# Altium PCB Inverter Driver Board.PcbDoc
Units mm, origin at the board's own origin, x right, y up, seen from the top; angles counter-clockwise.
Board outline 180.09 x 150.03 mm, 2 copper layers (Top Layer, Bottom Layer); 42 components, 39 nets, 146 pads, 41 vias.
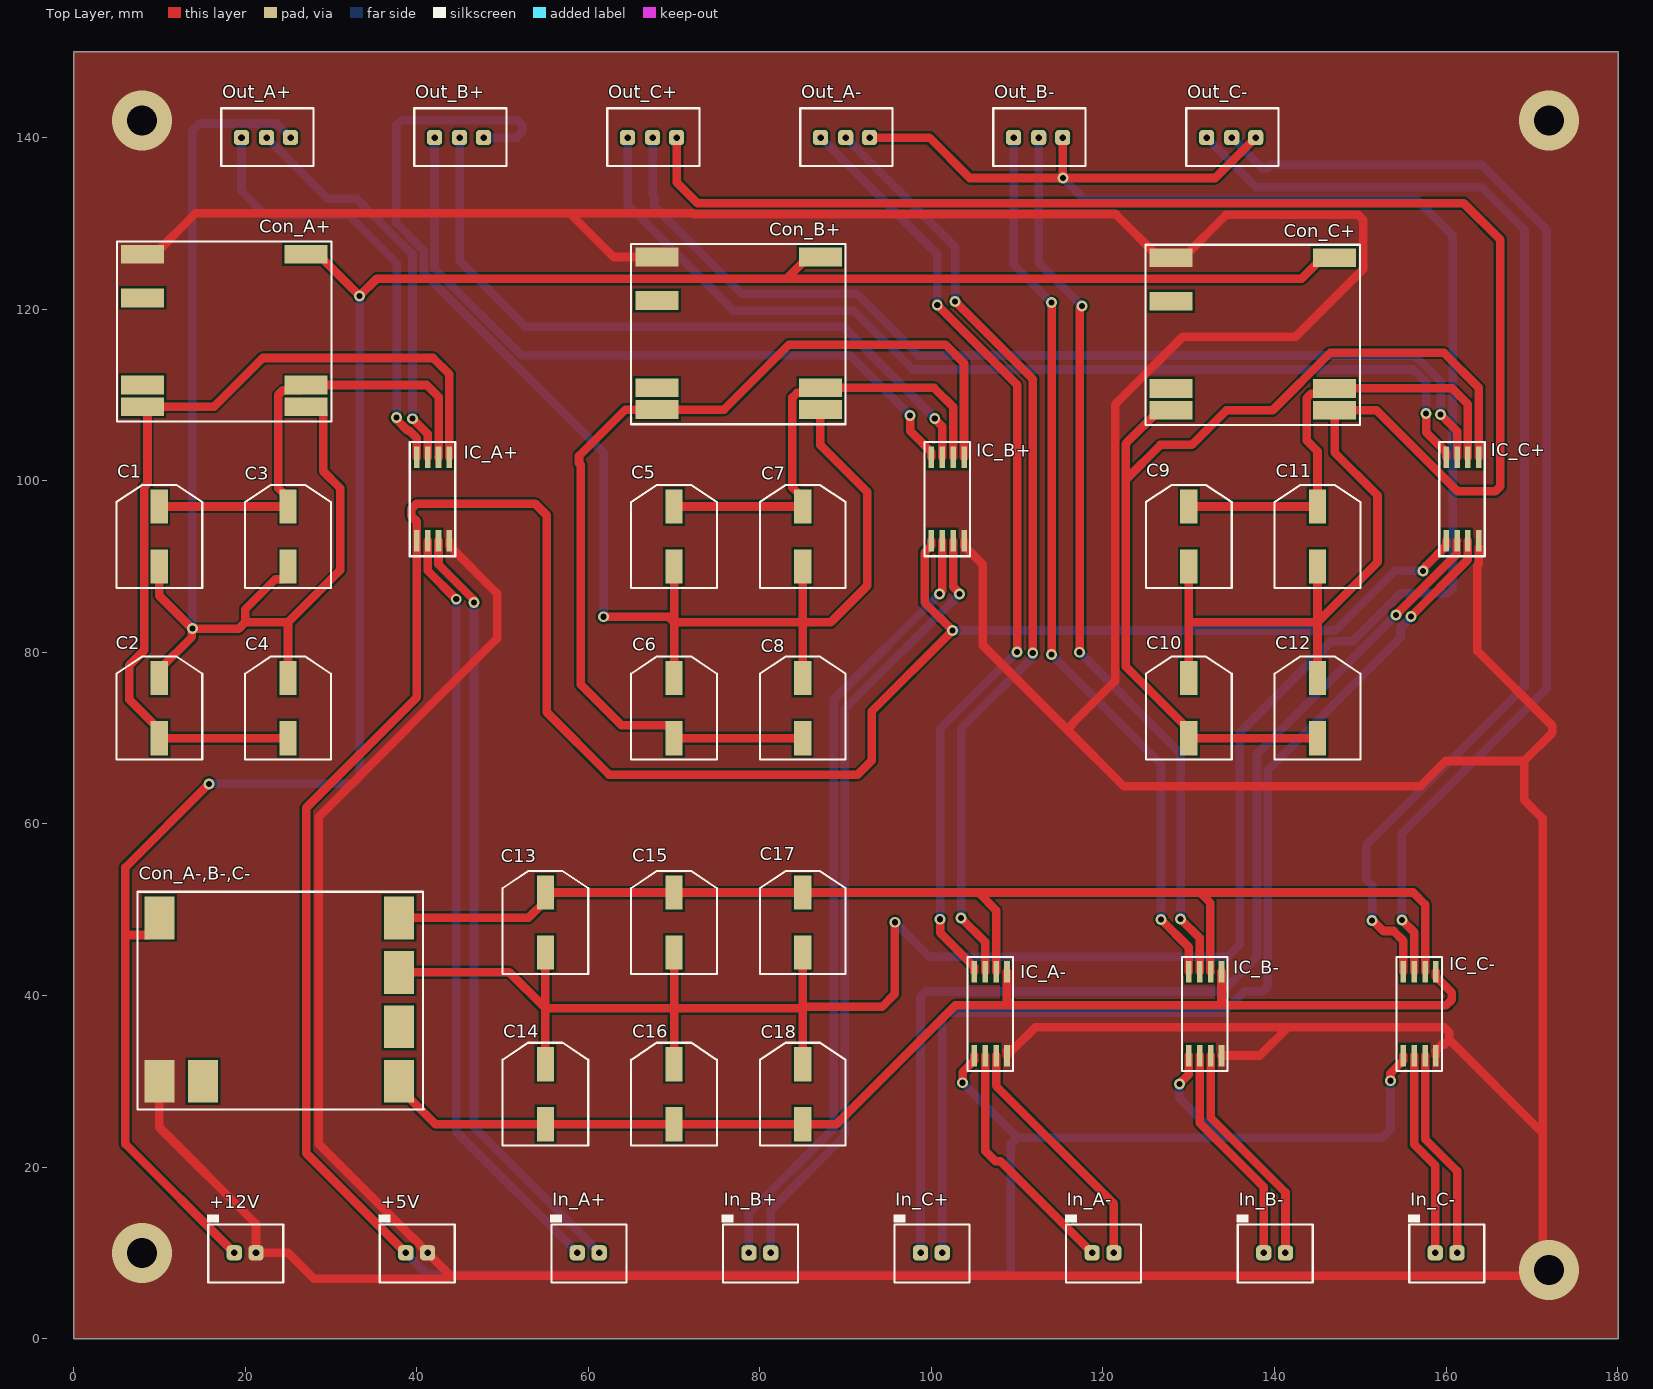
[diagram p0: Top Layer view]
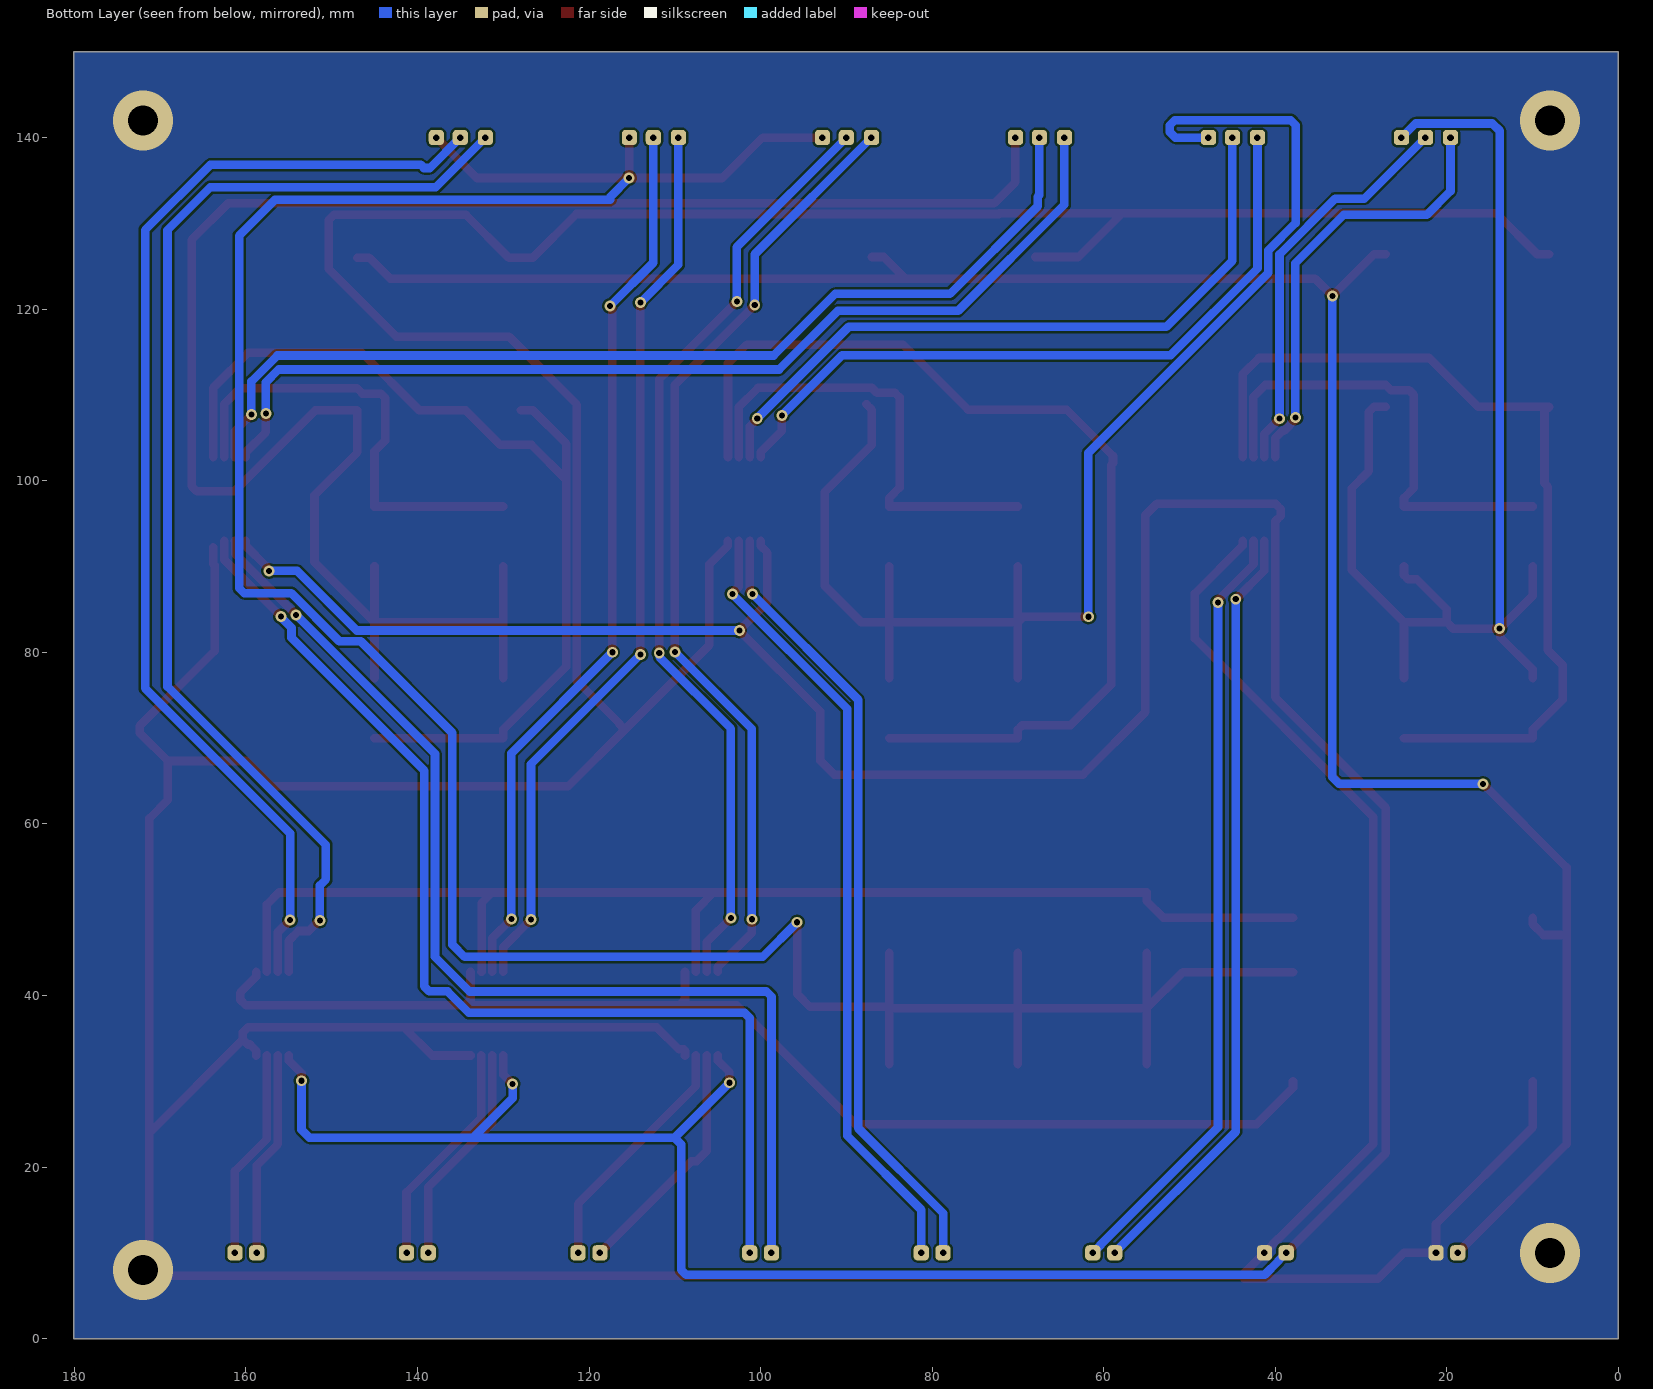
[diagram p1: Bottom Layer view, seen from below]

## Layer stack, top to bottom
Top Solder: solder mask 0.0102, Solder Resist, Dk 3.5
Top Layer: signal copper 0.0356
Dielectric 1: dielectric 0.32, FR-4, Dk 4.8
Bottom Layer: signal copper 0.0356
Bottom Solder: solder mask 0.0102, Solder Resist, Dk 3.5

## Board outline
0,0 180.087,0 180.087,150.032 0,150.032

## Design rules (kind name [scope] priority, off if disabled: settings)
Clearance [All] p1: gap=0.254 ignorepadtopadclearanceinfootprint=FALSE except(0: Arc-Hole Track-Hole SMDPad-Hole THPad-Hole Via-Hole Fill-Hole Poly-Hole Region-Hole Text-Hole)
PolygonConnect [All] p1: connectstyle=Direct reliefconductorwidth=0.254 reliefentries=4 polygonreliefangle="90 Angle" airgapwidth=0.254
RoutingVias [All] p1: holewidth=0.711 width=1.27 viastyle="Through Hole" minholewidth=0.711 minwidth=1.27 maxholewidth=0.711 maxwidth=1.27
SolderMaskExpansion [All] p1: expansion=0.102 istentingtop=FALSE
Width [All] p1: maxlimit=2 minlimit=1 preferedwidth=1 minimp=50.000000 maximp=50.000000 favimp=50.000000
30 further rules are at their usual default settings.

## Components (designator, comment, footprint, x,y, rotation, side; value= is the part's Value field where it differs from the comment)
+5V "JT2" PCBComponent_1#1 40,10 r0 top (schematic designator "+5V Supply")
+12V "JT2" PCBComponent_1#1 20,10 r0 top
C1 "Cap" Cap 10,90 r0 top
C2 "Cap" Cap 10,70 r0 top
C3 "Cap" Cap 25,90 r0 top
C4 "Cap" Cap 25,70 r0 top
C5 "Cap" Cap 70,90 r0 top
C6 "Cap" Cap 70,70 r0 top
C7 "Cap" Cap 85,90 r0 top
C8 "Cap" Cap 85,70 r0 top
C9 "Cap" Cap 130,90 r0 top
C10 "Cap" Cap 130,70 r0 top
C11 "Cap" Cap 145,90 r0 top
C12 "Cap" Cap 145,70 r0 top
C13 "Cap" Cap 55,45 r0 top
C14 "Cap" Cap 55,25 r0 top
C15 "Cap" Cap 70,45 r0 top
C16 "Cap" Cap 70,25 r0 top
C17 "Cap" Cap 85,45 r0 top
C18 "Cap" Cap 85,25 r0 top
Con_A+ "Component_1" PCBComponent_1#2 8.058,126.398 r270 top
Con_A-,B-,C- "MGJ6T12" MGJ6T12 10,30 r0 top (schematic designator A-,B-,C-)
Con_B+ "Component_1" PCBComponent_1#2 68,126.08 r270 top
Con_C+ "Component_1" PCBComponent_1#2 127.95,126 r270 top
IC_A+ "1EDC60H12AH" 1EDC60H12AH 40,90 r90 top
IC_A- "1EDC60H12AH" 1EDC60H12AH 105,30 r90 top
IC_B+ "1EDC60H12AH" 1EDC60H12AH 100,90 r90 top
IC_B- "1EDC60H12AH" 1EDC60H12AH 130,30 r90 top
IC_C+ "1EDC60H12AH" 1EDC60H12AH 160,90 r90 top
IC_C- "1EDC60H12AH" 1EDC60H12AH 155,30 r90 top
In_A+ "JT2" PCBComponent_1#1 60,10 r0 top
In_A- "JT2" PCBComponent_1#1 120,10 r0 top
In_B+ "JT2" PCBComponent_1#1 80,10 r0 top
In_B- "JT2" PCBComponent_1#1 140,10 r0 top
In_C+ "JT2" PCBComponent_1#1 100,10 r0 top
In_C- "JT2" PCBComponent_1#1 160,10 r0 top
Out_A+ "JT3" JT3 22.5,140 r0 top
Out_A- "JT3" JT3 90,140 r0 top
Out_B+ "JT3" JT3 45,140 r0 top
Out_B- "JT3" JT3 112.5,140 r0 top
Out_C+ "JT3" JT3 67.5,140 r0 top
Out_C- "JT3" JT3 135,140 r0 top

## Footprints (in the part's own frame and the unit in brackets; to place one, negate y for a bottom-side part, rotate by r counter-clockwise, add the part's x,y. Pads: shape width x height; smd on the part's side, far side on the other; paste and mask are expansions set on the pad)
1EDC60H12AH [mm]
  rect 2.5x0.65 smd: 1(3,0) 2(3,-1.27) 3(3,-2.54) 4(3,-3.81) 5(12.75,-3.81) 6(12.75,-2.54) 7(12.75,-1.27) 8(12.75,0)
  silkscreen extent 1.2,-4.5 14.5,0.8
Cap [mm]
  rect 2x4 smd: 1(0,7) 2(0,0)
  silkscreen extent -5,-2.5 5,9.5
JT3 [mil]
  rrect50% 70x70 hole 30: 1(-115,0) 2(0,0) 3(110,0)
  silkscreen extent -208,-131 215,135
MGJ6T12 [mm]
  rect 3.5x5 smd: 1(0,0) 2(5.08,0) 3(27.94,0) 4(27.94,6.35) 5(27.94,12.7) 6(27.94,19.05) 7(0,19.05)
  silkscreen extent -2.54,-3.3 30.86,22.1
PCBComponent_1#1 [mil]
  rrect50% 70x70 hole 30: 1(-50,0) 2(50,0)
  silkscreen extent -175,-136 175,175
PCBComponent_1#2 [mil]
  rect 86.61x196.85 smd: 1(0,0) 3(200,0) 7(600,0) 8(700,0) 9(700,750) 10(600,750) 16(0,750)
  silkscreen extent -59,-118 768,866

## Via types
v1: diameter 1.27, hole 0.711, Top Layer to Bottom Layer, 37 vias
v2: diameter 7, hole 3.5, Top Layer to Bottom Layer, 4 vias

## Nets (pads, with @x,y where several pads share a name; then routed paths per layer and width w, separated by ;. In a path a pad name is that pad's centre, name@x,y a point inside that pad or via, vN(x,y) a via of type N, cw(c..) or ccw(c..) an arc to the next point about the centre after c; other vN are vias at no path point)
Net+5V_1: +5V.1 IC_A+.1 IC_A-.1 IC_B+.1 IC_B-.1 IC_C+.1 IC_C-.1 | length 436.4
  Top Layer w1: +5V.1 27.128,21.602 27.128,61.878 40,74.75 IC_A+.1 40,95.284 39.39,95.895 39.39,96.723 39.975,97.309 53.821,97.309 55.163,95.966 55.163,73.004 62.415,65.753 91.419,65.753 93.031,67.364 93.031,73.104 v1(102.476,82.549) 99.2,85.825 99.2,91.625 100,92.425 IC_B+.1 ; v1(103.639,29.83) 103.639,31.064 105,32.425 IC_A-.1 ; v1(128.898,29.686) 130,30.788 IC_B-.1 ; v1(153.514,30.062) 153.514,30.939 155,32.425 IC_C-.1 ; 157.644,90.069 160,92.425 IC_C+.1
  Bottom Layer w1: +5V.1 39.627,9.103 39.627,9.059 41.236,7.45 108.682,7.45 109.268,8.036 109.268,22.655 110.041,23.428 ; v1(102.476,82.549) 147.062,82.549 153.998,89.485 v1(157.294,89.485) ; v1(103.639,29.83) 110.041,23.428 ; v1(128.898,29.686) 128.898,28.046 133.515,23.428 ; v1(153.514,30.062) 153.514,24.353 152.589,23.428 133.515,23.428 ; 110.041,23.428 133.515,23.428
Net+5V_2: +5V.2 +12V.2 Con_A+.1 Con_A-,B-,C-.1 Con_B+.1 Con_C+.1 IC_A+.4 IC_A-.4 IC_B+.4 IC_B-.4 IC_C+.4 IC_C-.4 | length 777.5
  Top Layer w1: Con_A+.1 9.458,126.398 14.217,131.157 57.881,131.157 ; 10,30 10,24.635 21.27,13.365 +12V.2 25,10 28,7 43.604,7 43.937,7.333 ; IC_A+.4 43.81,92.425 49.367,86.868 49.367,81.602 28.584,60.819 28.584,22.686 39.627,11.643 39.671,11.643 40.373,10.941 40.373,10.897 +5V.2 43.937,7.333 ; Con_B+.1 62.958,126.08 57.881,131.157 ; IC_B+.4 103.81,92.425 105.995,90.24 105.995,80.813 115.827,70.981 ; IC_A-.4 108.81,33.575 108.985,33.75 109.56,33.75 112.092,36.282 141.551,36.282 ; IC_B-.4 138.269,33 141.551,36.282 ; IC_C-.4 158.81,33.575 159.517,34.282 159.767,34.282 160.352,34.868 ; IC_C+.4@163.778,92.25 163.778,90.267 163.649,90.139 163.649,80.146 172.36,71.435 172.36,70.607 169.084,67.331 ; 43.937,7.333 170.661,7.333 171.247,7.919 171.247,23.973 ; 57.881,131.157 72.16,131.157 72.222,131.094 121.456,131.094 126.55,126 Con_C+.1 129.35,126 134.339,130.989 149.747,130.989 150.333,130.403 150.333,124.666 142.44,116.774 129.298,116.774 121.405,108.882 121.405,76.656 116.437,71.688 116.437,71.591 115.827,70.981 ; 115.827,70.981 122.406,64.402 157.012,64.402 159.941,67.331 169.084,67.331 ; 141.551,36.282 159.767,36.282 160.352,35.696 160.352,34.868 ; 160.352,34.868 171.247,23.973 ; 169.084,67.331 169.084,62.807 171.247,60.645 171.247,23.973
  other v2: 172,8 8,10 8,142 172,142
Net+12V_1: +12V.1 Con_A+.16 Con_A-,B-,C-.7 Con_B+.16 Con_C+.16 | length 271.9
  Top Layer w1: 6.053,47.05 6.053,22.677 +12V.1 ; 10,49.05 10,48.3 8.75,47.05 6.051,47.05 6.051,54.927 v1(15.794,64.671) ; Con_A+.16 28.508,126.398 33.349,121.557 v1(33.349,121.553) 35.339,123.542 83.112,123.542 ; Con_B+.16 85.65,126.08 83.112,123.542 ; Con_C+.16 145.6,126 143.142,123.542 83.112,123.542
  Bottom Layer w1: v1(15.794,64.671) 32.591,64.671 33.349,65.43 v1(33.349,121.553)
NetA-,B-,C-_3: C14.2 C16.2 C18.2 Con_A-,B-,C-.3 IC_A-.5 IC_B-.5 IC_C-.5 | length 143.6
  Top Layer w1: 37.94,30 37.94,29.25 42.19,25 C14.2 C16.2 C18.2 88.928,25 102.772,38.844 109.5,38.844 ; IC_A-.5 108.81,39.534 109.5,38.844 ; IC_B-.5 133.81,39.534 134.5,38.844 ; IC_C-.5 158.81,42.175 160.643,40.342 160.643,39.514 159.973,38.844 134.5,38.844 ; 109.5,38.844 134.5,38.844
NetA-,B-,C-_5: C13.2 C14.1 C15.2 C16.1 C17.2 C18.1 Con_A-,B-,C-.5 Out_A-.3 Out_B-.3 Out_C-.3 | length 349.7
  Top Layer w1: 37.94,42.7 50.8,42.7 55,38.5 ; C14.1 55,38.5 ; C13.2 55,38.5 ; C16.1 70,38.5 ; C15.2 70,38.5 ; C18.1 85,38.5 ; C17.2 85,38.5 ; Out_A-.3 99.763,140 104.474,135.288 v1(115.322,135.288) ; v1(95.737,48.531) 95.737,40.163 94.281,38.708 85.208,38.708 85,38.5 ; Out_B-.3 115.294,135.316 v1(115.322,135.288) ; Out_C-.3 133.082,135.288 v1(115.322,135.288) ; 55,38.5 70,38.5 ; 70,38.5 85,38.5
  Bottom Layer w1: v1(95.737,48.531) 99.767,44.5 134.5,44.5 135.942,45.942 135.942,70.629 146.607,81.295 149.103,81.295 154.719,86.911 160.2,86.911 160.786,87.497 160.786,128.566 156.602,132.75 117.529,132.75 117.529,133.081 v1(115.322,135.288)
NetA-,B-,C-_6: C13.1 C15.1 C17.1 Con_A-,B-,C-.6 IC_A-.6 IC_B-.6 IC_C-.6 | length 149.7
  Top Layer w1: 37.94,49.05 53.05,49.05 55,51 C13.1 C15.1 C17.1 105.481,52 ; IC_A-.6 107.54,49.941 105.481,52 ; IC_B-.6 132.524,42.766 132.524,50.783 131.307,52 ; IC_C-.6 157.54,50.616 156.156,52 131.307,52 ; 105.481,52 131.307,52
NetC1_1: C1.1 C3.1 Con_A+.10 IC_A+.6 | length 55.3
  Top Layer w1: C1.1 C3.1 25,98 23.854,99.146 23.854,110.031 24.382,110.558 26.508,110.558 Con_A+.10 41.184,111.158 42.555,109.787 42.555,102.765 IC_A+.6
NetC1_2: C1.2 C2.1 C3.2 C4.1 Con_A+.9 Out_A+.3 | length 143.9
  Top Layer w1: C2.1 10,78 13.797,81.797 13.797,82.706 v1(13.849,82.758) ; C1.2 10,86.607 v1(13.849,82.758) ; C4.1 25,83.5 ; C3.2 25,89 24.5,88.5 23.5,88.5 20,85 20,83.5 ; Con_A+.9 28.508,108.618 29.108,108.018 29.108,101.108 31.072,99.145 31.072,89.572 25,83.5 ; v1(13.849,82.758) 19.258,82.758 20,83.5 ; 20,83.5 25,83.5
  Bottom Layer w1: v1(13.849,82.758) 13.849,140.792 14.7,141.643 23.651,141.643 Out_A+.3
NetC2_2: C2.2 C4.2 Con_A+.8 IC_A+.5 | length 104.7
  Top Layer w1: C4.2 C2.2 10,71 6.5,74.5 6.5,78.5 8.246,80.246 8.246,99.312 8.618,99.684 8.618,108.059 Con_A+.8 16.379,108.618 22.068,114.308 41.905,114.308 43.81,112.402 IC_A+.5
NetC5_1: C5.1 C7.1 Con_B+.10 IC_B+.6 | length 54.2
  Top Layer w1: C5.1 C7.1 85,98 83.796,99.204 83.796,109.712 84.324,110.24 86.45,110.24 Con_B+.10 95.821,110.84 95.835,110.826 100.311,110.826 102.54,108.597 IC_B+.6
NetC5_2: C5.2 C6.1 C7.2 C8.1 Con_B+.9 Out_B+.3 | length 170.4
  Top Layer w1: v1(61.781,84.148) 69.352,84.148 70,83.5 ; C6.1 70,83.5 ; C5.2 70,83.5 ; C8.1 85,83.5 ; C7.2 85,83.5 ; Con_B+.9@87.65,108.9 Con_B+.9 87.05,104.171 92.526,98.695 92.526,87.75 88.275,83.5 85,83.5 ; 70,83.5 85,83.5
  Bottom Layer w1: Out_B+.3 51.657,140 52.283,140.626 52.283,141.455 51.698,142.04 38.227,142.04 37.641,141.455 37.641,130.031 40.825,126.848 40.825,124.232 61.781,103.276 v1(61.781,84.148)
NetC6_2: C6.2 C8.2 Con_B+.8 IC_B+.5 | length 117.9
  Top Layer w1: C8.2 C6.2 70,71 69.5,71.5 63.859,71.5 59.119,76.241 59.119,101.86 58.923,102.055 58.923,102.883 64.34,108.3 Con_B+.8 75.824,108.3 83.391,115.867 101.628,115.867 103.794,113.7 103.794,102.766 IC_B+.5
NetC9_1: C9.1 C11.1 Con_C+.10 IC_C+.6 | length 54.3
  Top Layer w1: C9.1 C11.1 145,103.439 143.746,104.693 143.746,109.632 144.274,110.16 146.4,110.16 Con_C+.10 160.704,110.76 162.54,108.924 IC_C+.6
NetC9_2: C9.2 C10.1 C11.2 C12.1 Con_C+.9 Out_C+.3 | length 226.9
  Top Layer w1: Out_C+.3 70.294,134.796 72.742,132.348 162.063,132.348 166.327,128.085 166.327,99.359 165.741,98.773 161.336,98.773 151.889,108.22 Con_C+.9 147,103.303 152.002,98.302 152.002,90.502 145,83.5 ; C10.1 130,83.5 ; C9.2 130,83.5 ; C12.1 145,83.5 ; C11.2 145,83.5 ; 130,83.5 145,83.5
NetC10_2: C10.2 C12.2 Con_C+.8 IC_C+.5 | length 116.3
  Top Layer w1: Con_C+.8 126.55,108.22 122.659,104.329 122.659,100.128 ; C12.2 C10.2 130,71 122.659,78.341 122.659,100.128 ; IC_C+.5 163.81,110.85 159.763,114.897 146.471,114.897 139.794,108.22 134.39,108.22 130.344,104.174 126.705,104.174 122.659,100.128
NetIC_A+_2: IC_A+.2 In_A+.1 | length 90.4
  Top Layer w1: IC_A+.2 41.27,89.531 v1(44.608,86.193)
  Bottom Layer w1: v1@44.503,86.298 v1(44.608,86.193) 44.608,24.122 In_A+.1
NetIC_A+_3: IC_A+.3 In_A+.2 | length 90.8
  Top Layer w1: IC_A+.3 42.54,90.25 46.63,86.16 46.63,85.882 v1(46.682,85.83)
  Bottom Layer w1: v1@46.675,85.837 v1(46.682,85.83) 46.682,24.632 60.373,10.941 60.373,10.897 In_A+.2
NetIC_A+_7: IC_A+.7 Out_A+.2 | length 47
  Top Layer w1: v1(39.516,107.233) 41.27,105.479 IC_A+.7
  Bottom Layer w1: Out_A+.2 29.615,132.885 33.014,132.885 39.516,126.384 v1(39.516,107.233)
NetIC_A+_8: IC_A+.8 Out_A+.1 | length 51.5
  Top Layer w1: v1(37.658,107.366) 37.71,107.314 37.71,107.075 38.968,105.817 39.159,105.817 40,104.975 IC_A+.8
  Bottom Layer w1: Out_A+.1 19.579,133.76 22.355,130.983 32.041,130.983 37.658,125.366 v1(37.658,107.366)
NetIC_A-_2: IC_A-.2 In_A-.1 | length 28.5
  Top Layer w1: IC_A-.2 106.27,21.871 107.469,20.672 108.058,20.672 In_A-.1
NetIC_A-_3: IC_A-.3 In_A-.2 | length 28.7
  Top Layer w1: IC_A-.3 107.54,29.454 121.27,15.724 In_A-.2
NetIC_A-_7: IC_A-.7 Out_A-.2 | length 110.9
  Top Layer w1: v1(102.767,120.89) 111.808,111.849 v1(111.808,79.918) ; v1(103.456,49.043) 106.27,46.23 IC_A-.7
  Bottom Layer w1: Out_A-.2 102.767,127.233 v1(102.767,120.89) ; v1(103.456,49.043) 103.456,71.108 111.756,79.408 111.756,79.866 v1(111.808,79.918)
NetIC_A-_8: IC_A-.8 Out_A-.1 | length 112.1
  Top Layer w1: v1(100.675,120.497) 109.987,111.186 v1(109.987,80.039) ; v1(101.01,48.887) 101.01,47.315 105,43.325 IC_A-.8
  Bottom Layer w1: Out_A-.1 100.675,126.404 v1(100.675,120.497) ; v1(101.01,48.887) 101.01,71.063 v1(109.987,80.039)
NetIC_B+_2: IC_B+.2 In_B+.1 | length 92.3
  Top Layer w1: v1(100.945,86.792) 100.945,86.865 101.254,87.174 101.254,92.984 IC_B+.2
  Bottom Layer w1: In_B+.1 78.73,14.634 88.625,24.529 88.625,74.471 v1(100.945,86.792)
NetIC_B+_3: IC_B+.3 In_B+.2 | length 92.4
  Top Layer w1: IC_B+.3 102.54,87.633 103.293,86.88 v1(103.293,86.806)
  Bottom Layer w1: In_B+.2 81.27,15.018 89.879,23.626 89.879,73.392 v1(103.293,86.806)
NetIC_B+_7: IC_B+.7 Out_B+.2 | length 82.2
  Top Layer w1: v1(100.385,107.279) 100.385,107.206 101.254,106.337 101.254,102.766 IC_B+.7
  Bottom Layer w1: Out_B+.2 45,125.636 52.69,117.947 89.717,117.947 v1(100.385,107.279)
NetIC_B+_8: IC_B+.8 Out_B+.1 | length 83.7
  Top Layer w1: v1(97.494,107.623) 97.546,107.571 97.546,105.779 100,103.325 IC_B+.8
  Bottom Layer w1: Out_B+.1 42.079,124.752 52.188,114.643 90.474,114.643 v1(97.494,107.623)
NetIC_B-_2: IC_B-.2 In_B-.1 | length 26.1
  Top Layer w1: IC_B-.2 131.27,25.137 138.73,17.677 In_B-.1
NetIC_B-_3: IC_B-.3 In_B-.2 | length 26.6
  Top Layer w1: IC_B-.3 132.54,25.772 141.27,17.042 In_B-.2
NetIC_B-_7: IC_B-.7 Out_B-.2 | length 105.2
  Top Layer w1: v1(117.284,80.005) 117.284,120.108 v1(117.542,120.367) ; v1(129.051,48.924) 131.27,46.705 IC_B-.7
  Bottom Layer w1: Out_B-.2 112.5,125.409 v1(117.542,120.367) ; v1(117.284,80.005) 129.051,68.238 v1(129.051,48.924)
NetIC_B-_8: IC_B-.8 Out_B-.1 | length 105.7
  Top Layer w1: v1(113.996,79.738) 114.012,79.754 v1(114.012,120.759) ; v1(126.758,48.86) 130,45.617 IC_B-.8
  Bottom Layer w1: Out_B-.1 109.579,125.192 v1(114.012,120.759) ; v1(113.996,79.738) 126.758,66.977 v1(126.758,48.86)
NetIC_C+_2: IC_C+.2 In_C+.1 | length 129.2
  Top Layer w1: v1(154.142,84.369) 161.254,91.481 161.254,92.984 IC_C+.2
  Bottom Layer w1: In_C+.1 98.73,39.876 99.316,40.462 133.92,40.462 137.948,44.49 137.948,68.175 v1(154.142,84.369)
NetIC_C+_3: IC_C+.3 In_C+.2 | length 128.4
  Top Layer w1: v1(155.905,84.168) 162.524,90.787 162.524,92.984 IC_C+.3
  Bottom Layer w1: In_C+.2 101.27,37.388 101.856,37.974 133.99,37.974 136.488,40.473 138.616,40.473 139.202,41.059 139.202,66.218 154.68,81.696 154.68,82.87 155.905,84.095 v1(155.905,84.168)
NetIC_C+_7: IC_C+.7 Out_C+.2 | length 117.8
  Top Layer w1: v1(159.357,107.707) 161.27,105.794 IC_C+.7
  Bottom Layer w1: Out_C+.2 67.5,133.297 67.702,133.095 67.702,132.007 77.931,121.778 91.315,121.778 98.497,114.596 156.326,114.596 159.357,111.565 v1(159.357,107.707)
NetIC_C+_8: IC_C+.8 Out_C+.1 | length 119.6
  Top Layer w1: Out_C+.1 Out_C+.1@64.851,140.272 ; v1(157.665,107.829) 157.665,105.66 160,103.325 IC_C+.8
  Bottom Layer w1: Out_C+.1 64.579,132.191 76.951,119.819 90.989,119.819 97.845,112.963 156.185,112.963 157.665,111.484 v1(157.665,107.829)
NetIC_C-_2: IC_C-.2 In_C-.1 | length 24
  Top Layer w1: IC_C-.2 156.27,22.637 158.73,20.177 In_C-.1
NetIC_C-_3: IC_C-.3 In_C-.2 | length 24.5
  Top Layer w1: IC_C-.3 157.54,23.272 161.27,19.542 In_C-.2
NetIC_C-_7: IC_C-.7 Out_C-.2 | length 135.6
  Top Layer w1: v1(154.848,48.781) 156.27,47.359 IC_C-.7
  Bottom Layer w1: Out_C-.2 138.544,136.456 139.234,136.456 139.623,136.845 164.117,136.845 171.746,129.216 171.746,75.811 154.848,58.913 v1(154.848,48.781)
NetIC_C-_8: IC_C-.8 Out_C-.1 | length 138.2
  Top Layer w1: v1(151.374,48.742) 151.447,48.742 152.676,47.513 153.871,47.513 155,46.384 IC_C-.8
  Bottom Layer w1: Out_C-.1 137.844,134.235 164.117,134.235 169.136,129.216 169.136,76.012 150.665,57.541 150.665,53.532 151.374,52.824 v1(151.374,48.742)
pads on no net: Con_A+.3 Con_A+.7 Con_A-,B-,C-.2 Con_A-,B-,C-.4 Con_B+.3 Con_B+.7 Con_C+.3 Con_C+.7

## Polygon pours and split planes (outlines as drawn)
Net+5V_2 on Bottom Layer "NET+5V_2_L02_P006" (solid, pour order 6): 0,150.032 180.087,150.032 180.087,0 0,0
Net+5V_2 on Top Layer "NET+5V_2_L01_P005" (solid, pour order 5): 0,150.032 180.087,150.032 180.087,0 0,0